# Altium PCB AdaptWing.PcbDoc
Units mil, origin at the board's own origin, x right, y up, seen from the top; angles counter-clockwise.
Board outline 2834.65 x 1811.02 mil, 2 copper layers (Top Layer, Bottom Layer); 33 components, 14 nets, 224 pads, 75 vias.
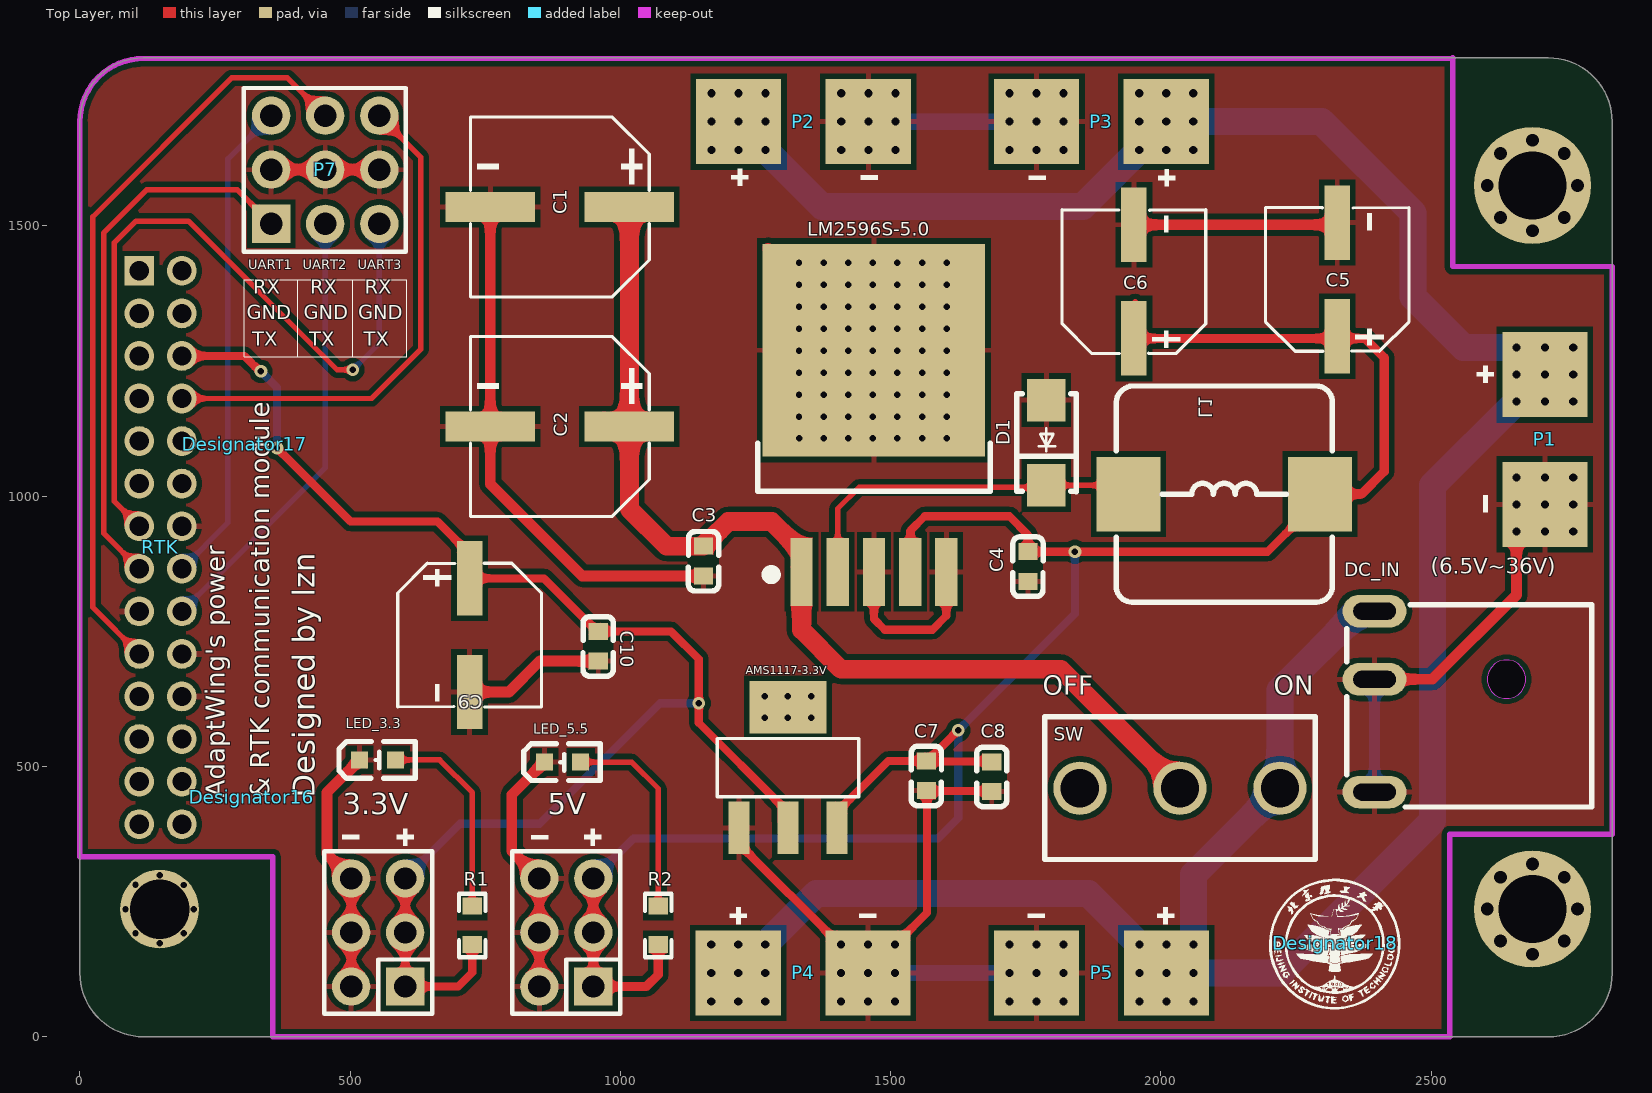
[diagram p0: Top Layer view]
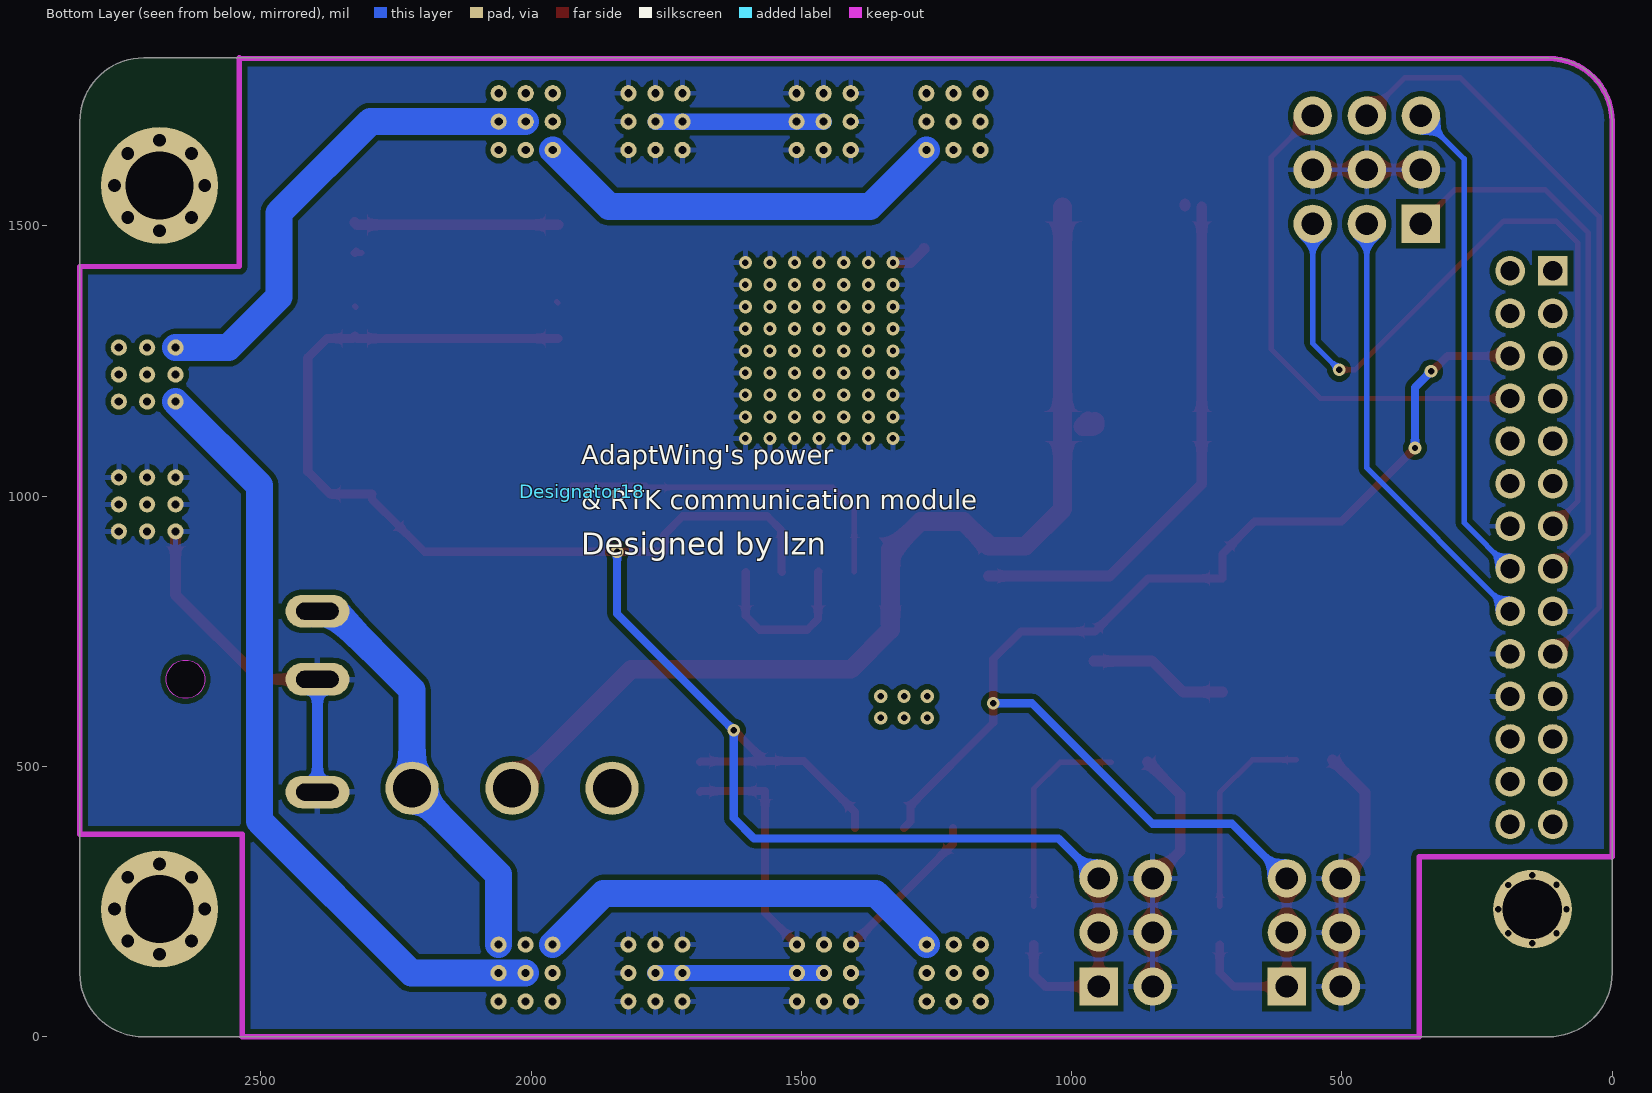
[diagram p1: Bottom Layer view, seen from below]
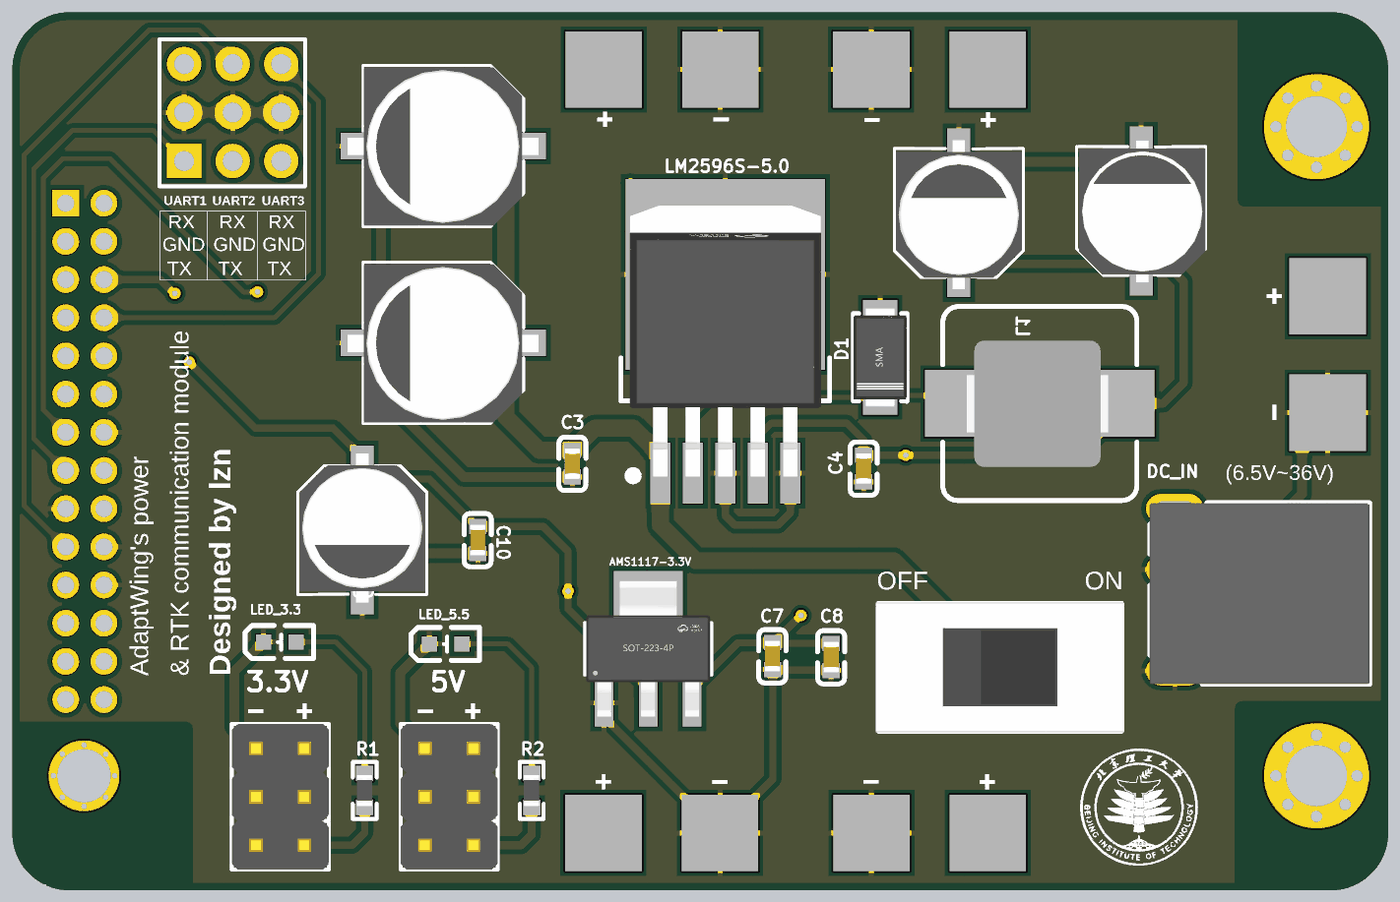
[diagram p2: 3D render of the assembled board from above, using the file's embedded part models]

## Layer stack, top to bottom
Top Solder: solder mask 0.4, Solder Resist, Dk 3.5
Top Layer: signal copper 1.4
Dielectric 1: dielectric 12.6, FR-4, Dk 4.8
Bottom Layer: signal copper 1.4
Bottom Solder: solder mask 0.4, Solder Resist, Dk 3.5

## Board outline
0,118.11 0,1692.91 cw(c118.11,1692.91) 118.11,1811.02 2716.54,1811.02 cw(c2716.54,1692.91) 2834.65,1692.91 2834.65,118.11 cw(c2716.54,118.11) 2716.54,0 118.11,0 cw(c118.11,118.11)

## Design rules (kind name [scope] priority, off if disabled: settings)
Clearance [All] p1: gap=10 ignorepadtopadclearanceinfootprint=FALSE except(0: Arc-Hole Track-Hole SMDPad-Hole THPad-Hole Via-Hole Fill-Hole Poly-Hole Region-Hole Text-Hole)
PolygonConnect [All] p1: connectstyle=Relief reliefconductorwidth=10 reliefentries=4 polygonreliefangle="90 Angle" airgapwidth=10
RoutingVias [All] p1: holewidth=28 width=50 viastyle="Through Hole" minholewidth=28 minwidth=50 maxholewidth=28 maxwidth=50
SolderMaskExpansion [All] p1: expansion=4 istentingtop=FALSE
Width Width_6 [InNet('UART3_RXD')] p1: maxlimit=10 minlimit=5 preferedwidth=7
Width Width_5 [InNet('3.3V')] p2: maxlimit=15 minlimit=10 preferedwidth=15
Width Width_4 [InNet('5V')] p3: maxlimit=17 minlimit=10 preferedwidth=17
Width Width_3 [InNet('GND')] p4: maxlimit=30 minlimit=10 preferedwidth=15
Width Width_2 [InNet('BAT')] p5: maxlimit=35 minlimit=10 preferedwidth=10
Width Width_1 [InNet('NetDC_IN_1')] p6: maxlimit=80 minlimit=10 preferedwidth=10
Width [All] p7: maxlimit=10 minlimit=10 preferedwidth=10
30 further rules are at their usual default settings.

## Classes and differential pairs
component class AdaptWing: 3.3V AMS1117-3.3V C1 C2 C3 C4 C5 C6 C7 C8 C9 C10 D1 DC_IN L1 LED_3.3 LED_5.5 LM2596S-5.0 P1 P2 P3 P4 P5 P7 R1 R2 RTK SW

## Components (designator, comment, footprint, x,y, rotation, side; value= is the part's Value field where it differs from the comment)
3.3V "3.3V" HDR-TH_6P-P2.54-V-M-R2-C3-S2.54-1 552,193 r90 top
5V "5V" HDR-TH_6P-P2.54-V-M-R2-C3-S2.54-1 900,193 r90 top
AMS1117-3.3V "AMS1117-3.3V" SOT-223-4_L6.5-W3.5-P2.30-LS7.0-BR 1325,498 r270 top
C1 "50V/220uF" CAP-SMD_BD8.0-L8.3-W8.3-FD 888,1535 r180 top
C2 "50V/100uF" CAP-SMD_BD8.0-L8.3-W8.3-FD 888,1129 r180 top
C3 "104" C0603 1154,880 r90 top
C4 "104" C0603 1754,870 r90 top
C5 "25V/220uF" CAP-SMD_BD6.3-L6.6-W6.6-LS7.4-FD 2326,1401 r90 top
C6 "16V/100uF" CAP-SMD_BD6.3-L6.6-W6.6-FD 1950,1397 r90 top
C7 "104" C0603 1566,483 r90 top
C8 "106" C0603 1687,481 r90 top
C9 "16V/100uF" CAP-SMD_BD6.3-L6.6-W6.6-FD 721,743 r270 top
C10 "104" C0603 959,722.55 r90 top
D1 "1N5824" 1N5824 1788,1099 r90 top
DC_IN "DC插座" DC-IN-TH_DC-044-BXXX 2540,625 r180 top
Designator16 "Comment" ID 318,444 r90 top
Designator17 "Comment" 串口引脚注释 305,1097 r0 top
Designator18 "Comment" BIT 2322,174 r0 top
Designator18 "Comment" ID 1904.96,1009 r180 bottom
L1 "33uH" 1040电感 2117,1009 r0 top
LED_3.3 "LED_3.3" 0603_LED 550,513 r0 top
LED_5.5 "LED_5.5" 0603_LED 892,509 r0 top
LM2596S-5.0 "LM2596S-5.0" TO263-5A 1469,1266.93 r0 top
P1 "XT60" 分电焊盘 2710,1105 r0 top
P2 "分电焊盘" 分电焊盘 1338.58,1692.91 r90 top locked
P3 "分电焊盘" 分电焊盘 1889.76,1692.91 r270 top locked
P4 "分电焊盘" 分电焊盘 1338,118.11 r90 top locked
P5 "分电焊盘" 分电焊盘 1890,118.11 r270 top locked
P7 "串口输出接口" 2.54mm-3×3p 354,1504 r0 top
R1 "1K" 0603C 727,206 r90 top
R2 "1K" 0603C 1071,206 r90 top
RTK "排母2.0mm" 2MM-28PINS 110,1417 r270 top locked
SW "SS-12D10L5" SW-TH_SS-12D10L5 2035,460 r180 top

## Footprints (in the part's own frame and the unit in brackets; to place one, negate y for a bottom-side part, rotate by r counter-clockwise, add the part's x,y. Pads: shape width x height; smd on the part's side, far side on the other; paste and mask are expansions set on the pad)
1N5824 [mm]
  rect 2x1.8 smd paste+0 mask+0.102: 1(-2,0) 2(2,0)
  silkscreen extent -2.3,-1.4 2.3,1.4, body extent -2.6,-1.4 2.6,1.4, height 2.1
2.54mm-3×3p [mm]
  rect 1.8x1.8 hole 1.05 paste+0 mask+0.051: 1(0,0)
  round 1.8 hole 1.05 paste+0 mask+0.051: 2(2.54,0) 3(5.08,0) 4(0,2.54) 5(2.54,2.54) 6(5.08,2.54) 7(0,5.08) 8(2.54,5.08) 9(5.08,5.08)
  silkscreen extent -1.3,-1.32 6.32,6.38
2MM-28PINS [mm]
  rect 1.4x1.4 hole 0.9 paste+0 mask+0.051: 1(0,0)
  round 1.4 hole 0.9 paste+0 mask+0.051: 2(0,2) 3(2,0) 4(2,2) 5(4,0) 6(4,2) 7(6,0) 8(6,2) 9(8,0) 10(8,2) 11(10,0) 12(10,2) 13(12,0) 14(12,2) 15(14,0) 16(14,2) 17(16,0) 18(16,2) 19(18,0) 20(18,2) 21(20,0) 22(20,2) 23(22,0) 24(22,2) 25(24,0) 26(24,2) 27(26,0) 28(26,2)
0603_LED [mm]
  rect 0.8x0.8 smd mask+0.051: 1(0.874,-0.019) 2(-0.828,-0.019)
  silkscreen extent -1.79,-0.88 1.79,0.84, body extent -0.71,-0.42 0.91,0.39, height 0.41
0603C [mm] "1.6mmx0.8mm"
  rect 0.8x0.9 smd: 1(-0.895,0.024) 2(0.905,0.024)
  silkscreen extent -1.5,-0.6 1.5,0.65, body extent -0.81,-0.38 0.81,0.43, height 0.45
1040电感 [mm]
  rect 3x3.5 smd paste+0 mask+0.102: 1(-4.5,-0.127) 2(4.5,-0.127)
  silkscreen extent -5.08,-5.21 5.08,4.95, body extent -3.83,-3.44 3.57,3.16, height 3
BIT [mil]
  silkscreen extent -122,-123 121,118
C0603 [mm]
  rect 0.8x0.9 smd paste+0 mask+0.051: 1(-0.7,0) 2(0.7,0)
  silkscreen extent -1.41,-0.71 1.39,0.72, body extent -0.8,-0.4 0.8,0.4, height 0.8
CAP-SMD_BD6.3-L6.6-W6.6-FD [mm]
  rect 3.5x1.2 smd paste+0 mask+0.051: 1(-2.67,0) 2(2.67,0)
  silkscreen extent -3.38,-3.38 3.38,3.38, body extent -4,-3.3 3.8,3.3, height 7.75
CAP-SMD_BD6.3-L6.6-W6.6-LS7.4-FD [mm]
  rect 3.5x1.2 smd paste+0 mask+0.051: 1(-2.67,0) 2(2.67,0)
  silkscreen extent -3.38,-3.38 3.38,3.38, body extent -3.73,-3.35 3.67,3.25, height 7.72
CAP-SMD_BD8.0-L8.3-W8.3-FD [mm]
  rect 4.2x1.4 smd paste+0 mask+0.051: 1(-3.267,0) 2(3.267,0)
  silkscreen extent -4.2,-4.23 4.2,4.23, body extent -4.97,-4.13 5.03,4.18, height 10.05
DC-IN-TH_DC-044-BXXX [mil]
  oval 118.11x60 hole 31.5 slot 78.74 at 0 deg paste+0 mask+1.97: 1(145,-162.33) 2(145,172.33) 3(145,-36.33)
  Keep-Out Layer board cut-out: -63.66,-36.34 -63.66,-31.67 -66.07,-22.66 -70.74,-14.58 -77.33,-7.98 -85.41,-3.32 -94.43,-0.9 -103.75,-0.9 -112.77,-3.32 -120.85,-7.98 -127.44,-14.58 -132.11,-22.66 -134.52,-31.67 -134.52,-36.34 -134.52,-41 -132.11,-50.01 -127.44,-58.09 -120.85,-64.69 -112.77,-69.35 -103.75,-71.77 -94.43,-71.77 -85.41,-69.35 -77.33,-64.69 -70.74,-58.09 -66.07,-50.01 -63.66,-41 -63.66,-36.34 -63.66,-36.34
  silkscreen extent -257,-174 196,200, body extent -256,-174 197,200, height 280
HDR-TH_6P-P2.54-V-M-R2-C3-S2.54-1 [mm]
  rect 1.8x1.8 hole 1.05 paste+0 mask+0.051: 1(-2.54,-1.27)
  round 1.8 hole 1.05 paste+0 mask+0.051: 2(-2.54,1.27) 3(0,-1.27) 4(0,1.27) 5(2.54,-1.27) 6(2.54,1.27)
  silkscreen extent -3.81,-2.54 3.81,2.54, body extent -3.81,-2.54 3.81,2.54, height 8.5
ID [mil]
SOT-223-4_L6.5-W3.5-P2.30-LS7.0-BR [mm]
  rect 2.47x0.98 smd paste+0 mask+0.051: 1(2.835,-2.681) 2(2.835,-0.381) 3(2.835,1.919)
  rect 2.47x3.6 smd paste+0 mask+0.051: 4(-2.835,-0.381)
  silkscreen extent -1.37,-3.71 1.37,2.95, body extent -3.55,-3.63 3.55,2.87, height 1.75
SW-TH_SS-12D10L5 [mm]
  round 2.5 hole 1.8 paste+0 mask+0.051: 1(-4.7,0) 2(0,0) 3(4.7,0)
  silkscreen extent -6.35,-3.35 6.35,3.35, body extent -6.5,-3.4 6.5,3.4, height 10.1
TO263-5A [mm]
  rect 1.05x3.2 smd paste+0 mask+0.051: 1(-3.4,-10.336) 2(-1.7,-10.336) 3(0,-10.336) 4(1.7,-10.336) 5(3.4,-10.336)
  rect 10.45x10 smd paste+0 mask+0.051: 3(0,0.078)
  silkscreen extent -5.46,-10.66 5.46,-4.3, body extent -5,-10.5 5,3.7, height 4.5
串口引脚注释 [mil]
  silkscreen extent -1,161 299,304
分电焊盘 [mil]
  round 30 hole 15: 1(-52.5,70) 1(-52.5,120) 1(-52.5,170) 1(0,70) 1(0,120) 1(0,170) 1(52.5,70) 1(52.5,120) 1(52.5,170) 2(-52.5,-170) 2(-52.5,-120) 2(-52.5,-70) 2(0,-170) 2(0,-120) 2(0,-70) 2(52.5,-170) 2(52.5,-120) 2(52.5,-70)
  rect 157.48x157.48 smd: 1(0,120) 2(0,-120)

## Part data
AMS1117-3.3V: "3.3V稳压芯片"
C1 C2 C5: BOM_Manufacturer=Yunxing, BOM_Manufacturer Part=ECG1KM470F14OTBO, BOM_Supplier=LCSC, BOM_Supplier Part=C525429, Contributor=LCSC, nameAlias=Capacitance, spicePre=C, spiceSymbolName="ECG1KM470F14OTBO COPY"
C6 C9: "电解电容", BOM_Manufacturer=Yunxing, BOM_Manufacturer Part=ECG1KM470F14OTBO, BOM_Supplier=LCSC, BOM_Supplier Part=C525429, Contributor=LCSC, nameAlias=Capacitance, spicePre=C, spiceSymbolName="ECG1KM470F14OTBO COPY"
L1: BOM_JLCPCB Part Class="Extended Part", BOM_Manufacturer=MAZO, BOM_Manufacturer Part=MPCA-0630-1R0-M, BOM_Supplier=LCSC, BOM_Supplier Part=C268399, Contributor=liuliubilc, nameAlias=Inductance, spicePre=L, spiceSymbolName=0630-1R0电感
LED_3.3: "LED_3.3，使用绿色LED"
LED_5.5: "LED_5.5，使用蓝色LED"
LM2596S-5.0: "5V稳压"
P1: "航模电池接口"
P2 P3 P4 P5: library part PWR_DIV
P7: library part 2.54mm-3×3p
R1 R2: "Resistor", LatestRevisionDate=17-Jul-2002, LatestRevisionNote="Re-released for DXP Platform.", PackageDescription="Axial Device, Thru-Hole; 2 Leads; 0.4 in Pin Spacing", PackageReference=AXIAL-0.4, Published=8-Jun-2000, Publisher="Altium Limited"
SW: "两档滑动开关", Actuator Color=黑色, Current Rating (AC)=3A, JLCPCB Part Class=扩展库, LCSC Part Name="柄长5mm 直插双档 滑动开关 大电流", Manufacturer="XKB Connectivity(中国星坤)", Operating Temperature=-40℃~+85℃, Voltage Rating (AC)=125V, Actuator Style=矩形柱状, Add into BOM=yes, Circuit=单刀双掷, Convert to PCB=yes, Current Rating (DC)=3A, Datasheet=https://atta.szlcsc.com/upload/public/pdf/source/20211009/D6412F37AABE6F9459A6EE7FA4DAEADB.pdf, Device=SS-12D10L5, Manufacturer Part=SS-12D10L5, Mechanical Life=1万次, Mounting Style=直插, Name=SS-12D10L5, Pin Style=PC引脚, Supplier=LCSC, Supplier Footprint=插件, Supplier Part=C319012, Switch Height=6.4mm, Switch Length=13mm, Switch Width=6.8mm, Symbol=SS-12D10L5, Voltage Rating (DC)=125V
C3 C4 C7 C8 C10: Contributor=LCEDA_Lib, nameAlias=Value(F), spicePre=C, spiceSymbolName=C_0603_US
D1: BOM_Supplier=lynxfoor, Contributor=xuncikulv, spicePre=D, spiceSymbolName=1N5824贴片

## Free pads (board coordinates)
  round 12.99 hole 11.81 paste+0 mask+4: 1(84.65,236.22) 1(103,281) 1(103.1,191.68) 1(147.64,173.23) 1(147.64,299.21) 1(192.18,280.76) 1(192.18,191.68) 1(210.63,236.22)
  round 145.67 hole 110.24 paste+0 mask+4: 1(147.64,236.22)
  round 24.21 hole 23.62 paste+0 mask+4: 1(2603.35,236.22) 1(2603.35,1574.8) 1(2627.95,177.17) 1(2627.95,295.28) 1(2627.95,1515.75) 1(2627.95,1633.86) 1(2687.01,152.56) 1(2687.01,319.88) 1(2687.01,1491.14) 1(2687.01,1658.46) 1(2746.06,177.17) 1(2746.06,295.28) 1(2746.06,1515.75) 1(2746.06,1633.86) 1(2770.67,236.22) 1(2770.67,1574.8)
  round 216.53 hole 125.98 paste+0 mask+4: 1(2687.01,236.22) 1(2687.01,1574.8)

## Via types
v1: diameter 24.21, hole 12, Top Layer to Bottom Layer, 69 vias
v2: diameter 23.62, hole 11.81, Top Layer to Bottom Layer, 6 vias

## Nets (pads, with @x,y where several pads share a name; then routed paths per layer and width w, separated by ;. In a path a pad name is that pad's centre, name@x,y a point inside that pad or via, vN(x,y) a via of type N, cw(c..) or ccw(c..) an arc to the next point about the centre after c; other vN are vias at no path point)
3.3V: 3.3V.1 3.3V.3 3.3V.5 AMS1117-3.3V.2 C9.1 C10.2 R1.1 RTK.6 | length 2738.3
  Top Layer w15: RTK.6 304.39,1259.52 332.91,1231 v2(335,1231) ; v2(364.78,1089.22) 501,953 661.4,953 721,893.4 C9.1 859.02,848.12 957.03,750.11 1093.89,750.11 1145,699 1145,581 1298.21,427.79 1298.21,398.18 AMS1117-3.3V.2 ; 3.3V.1 700,93 726.04,119.04 R1.1 ; 3.3V.1@602,94 3.3V.3 3.3V.5 3.3V.5@602,307
  Bottom Layer w15: v2(335,1231) 364.78,1201.22 v2(364.78,1089.22) ; 3.3V.5 703.09,394.09 850.14,394.09 1073.05,617 v2(1145,617)
5V: 5V.1 5V.3 5V.5 AMS1117-3.3V.3 C4.2 C5.1 C6.1 C7.2 C8.2 L1.2 LM2596S-5.0.4 R2.1 | length 3902.9
  Top Layer w10: C6.1@1950,1357.63 C6.1@1952.08,1359.71 ; C5.1@2323.92,1349.71 C5.1@2326,1351.79
  Top Layer w15: AMS1117-3.3V.3 1400.55,415.72 1495.39,510.56 C7.2 ; LM2596S-5.0.4 1536.71,860.78 1536.71,936.71 1563,963 1719.64,963 1754,928.64 C4.2 1754.28,897.28 v2(1840.72,897.28) 2197.29,897.28 2242.61,942.6 2294.17,994.16 L1.2 ; v2(1625,567) 1624.41,567 1567.97,510.56 C7.2 ; C8.2 1686,509.56 1567,509.56 C7.2
  Top Layer w17: 5V.5 5V.3 5V.1 1048,93 1070.04,115.04 R2.1 ; C6.1 2321.99,1291.88 C5.1 2329.89,1292 2377,1292 2413,1256 2413,1046 2371,1004 L1.2
  Bottom Layer w15: 5V.5 1024,367 1587.45,367 1625,404.55 v2(1625,567) 1840.72,782.72 v2(1840.72,897.28) v2@1843.06,897.28
BAT: C1.1 C2.1 C3.2 LM2596S-5.0.1 SW.2 | length 1955.8
  Top Layer w35: C2.1@956.9,1131 C2.1@956.9,1138.57 ; C2.1@961.51,1129 979.43,1129 C2.1@969.37,1139.06 ; C1.1 C2.1 1016.63,976.37 1085.44,907.55 C3.2 1199.44,953 1280,953 1327.51,905.49 1331.97,905.49 1335.14,902.32 1335.14,752.86 1408,680 1815,680 SW.2
GND: 3.3V.2 3.3V.4 3.3V.6 5V.2 5V.4 5V.6 AMS1117-3.3V.1 C1.2 C2.2 C3.1 C4.1 C5.2 C6.2 C7.1 C8.1 C9.2 C10.1 D1.2 DC_IN.2 DC_IN.3 LED_3.3.2 LED_5.5.2 LM2596S-5.0.3 LM2596S-5.0.5 P1.2 P2.2 P3.2 P4.2 P5.2 P7.4 P7.5 P7.6 RTK.14 RTK.17 RTK.20 RTK.22 | length 5358.4
  Top Layer w10: C5.2@2312.73,1450.21 C5.2@2326,1450.21
  Top Layer w15: 3.3V.2@502,94 3.3V.4 3.3V.6 ; 5V.2 5V.4 5V.6 ; AMS1117-3.3V.1 1219.45,357.06 1405.89,170.61 P4.2@1408,170.61 ; P4.2@1458,118.11 P4.2@1508,118.11 ; P2.2@1458.58,1692.91 P2.2@1508.58,1692.91 ; LM2596S-5.0.3@1468,861 1469,860 1469,773 1489,753 1577,753 1602.86,778.86 LM2596S-5.0.5 ; P4.2@1508,170.61 1567,229.61 1567,454.44 1686,454.44 C8.1 ; LM2596S-5.0.3@1508.58,1435.93 v1(1512.51,1432) ; P3.2@1719.76,1692.91 P3.2@1769.76,1692.91 ; P5.2@1720,118.11 P5.2@1770,118.11 ; C5.2@2323.21,1453 C5.2@2326,1450.21
  Top Layer w20: P7.4 P7.5 P7.6 ; 3.3V.6 457,338 457,451.85 LED_3.3.2 ; C9.2 793.88,637.88 851,695 C10.1 ; C1.2 C2.2 759.37,1022.63 929.56,852.45 C3.1 ; C1.2@790,1537 C1.2@790,1540.53 ; 5V.6 799,344 799,447.85 LED_5.5.2 ; LM2596S-5.0.3@1273.29,1458.71 1273.29,1456.85 1298.14,1432 v1(1330.39,1432) ; C6.2 2322.01,1502.12 C5.2 ; DC_IN.3 2501.33,661.33 2657.5,817.5 P1.2@2657.5,935
  Bottom Layer w20: DC_IN.2 DC_IN.3
  Bottom Layer w30: P4.2@1458,118.11 1508,118.11 1720,118.11 P5.2@1770,118.11 ; P2.2@1458.58,1692.91 1508.58,1692.91 1719.76,1692.91 P3.2@1769.76,1692.91
  other v1: 1330.41,1107 1375.94,1107 1421.47,1107 1467,1107 1512.53,1107 1558.06,1107 1603.59,1107 1330.39,1146.75 1375.92,1146.75 1421.45,1146.75 1466.98,1146.75 1512.51,1146.75 1558.04,1146.75 1603.57,1146.75 1330.39,1187.5 1375.92,1187.5 1421.45,1187.5 1466.98,1187.5 1512.51,1187.5 1558.04,1187.5 1603.57,1187.5 1330.39,1228.25 1375.92,1228.25 1421.45,1228.25 1466.98,1228.25 1512.51,1228.25 1558.04,1228.25 1603.57,1228.25 1330.39,1269 1375.92,1269 1421.45,1269 1466.98,1269 1512.51,1269 1558.04,1269 1603.57,1269 1330.39,1309.75 1375.92,1309.75 1421.45,1309.75 1466.98,1309.75 1512.51,1309.75 1558.04,1309.75 1603.57,1309.75 1330.39,1350.5 1375.92,1350.5 1421.45,1350.5 1466.98,1350.5 1512.51,1350.5 1558.04,1350.5 1603.57,1350.5 1330.39,1391.25 1375.92,1391.25 1421.45,1391.25 1466.98,1391.25 1512.51,1391.25 1558.04,1391.25 1603.57,1391.25 1375.92,1432 1421.45,1432 1466.98,1432 1558.04,1432 1603.57,1432
NetD1_1: D1.1 L1.1 LM2596S-5.0.2 | length 679.5
  Top Layer w10: LM2596S-5.0.2 1402.07,977.07 1441.32,1016.32 1784.06,1016.32 D1.1 1923.57,1020.26 L1.1
NetDC_IN_1: DC_IN.1 P1.1 P2.1 P3.1 P4.1 P5.1 SW.1 | length 4680.9
  Bottom Layer w50: P4.1@1268,170.61 1362.39,265 1865.61,265 P5.1@1960,170.61 ; P2.1@1268.58,1640.41 1373,1536 1855.35,1536 P3.1@1959.76,1640.41 ; P3.1@2009.76,1692.91 2059.76,1692.91 2297.31,1692.91 2466,1524.23 2466,1369 2560,1275 P1.1@2657.5,1275 ; P5.1@2010,118.11 2060,118.11 2221.11,118.11 2502,399 2502,1019.5 P1.1@2657.5,1175 ; P5.1@2060,170.61 2060,299.96 SW.1 2220.04,641.42 2365.95,787.33 DC_IN.1
NetLED_3.3_1: LED_3.3.1 R1.2 | length 377
  Top Layer w10: LED_3.3.1 665.75,512.25 726.04,451.96 R1.2
NetLED_5.5_1: LED_5.5.1 R2.2 | length 381.4
  Top Layer w10: LED_5.5.1 1020.75,508.25 1070.04,458.96 R2.2
UART1_RXD: P7.7 RTK.16 | length 906.6
  Bottom Layer w10: RTK.16 274,951.08 274,1624 P7.7
UART1_TXD: P7.1 RTK.15 | length 1017.8
  Top Layer w10: RTK.15 44,931.82 44,1487 124,1567 291,1567 P7.1
UART2_RXD: P7.8 RTK.19 | length 1409.7
  Top Layer w10: RTK.19 24,794.34 24,1517 281,1774 384,1774 P7.8
UART2_TXD: P7.2 RTK.18 | length 826.8
  Bottom Layer w10: RTK.18 454,1052.34 P7.2
UART3_RXD: P7.9 RTK.8 | length 943.9
  Top Layer w10: RTK.8 539.78,1180.78 631,1272 631,1627 P7.9
UART3_TXD: P7.3 RTK.13 | length 1405.3
  Top Layer w10: RTK.13 64,990.56 64,1469 104,1509 201,1509 476,1234 v2(505,1234)
  Bottom Layer w10: v2(505,1234) 554,1283 P7.3
pads on no net: AMS1117-3.3V.4 RTK.1 RTK.2 RTK.3 RTK.4 RTK.5 RTK.7 RTK.9 RTK.10 RTK.11 RTK.12 RTK.21 RTK.23 RTK.24 RTK.25 RTK.26 RTK.27 RTK.28 SW.3
copper on no net:
  other v1: 1267,590 1310,590 1353,590 1267,630 1310,630 1353,630

## Polygon pours and split planes (outlines as drawn)
GND on Bottom Layer "GND_L02_P000" (solid, pour order 0): 11,1742 14,1745 14,1754 24,1764 24,1768 36,1780 40,1780 50,1790 58,1790 69,1801 89,1801 96,1808 107,1808 109,1810 2539,1810 2540,1809 2540,1424 2833,1424 2834,1425 2836,1423 2836,374 2534,374 2533,373 2533,2 360,2 358,0 355,3 355,332 4,332 0.3,335.7 0.3,1725.3 6,1731 6,1739 11,1744
GND on Top Layer "GND_L01_P001" (solid, pour order 1): 5,1724 5,1728 9,1732 9,1742 15,1748 15,1753 22,1760 22,1764 30,1772 30,1773 40,1783 44,1783 50,1789 53,1789 62,1798 70,1798 76,1804 83,1804 87,1808 94,1808 95,1809 108,1809 110,1811 2540,1811 2541,1810 2541,1426 2831,1426 2835,1422 2835,376 2536,376 2533,373 2534,372 2534,0 359,0 356,3 356,331 4,331 0,335 4,339 4,1725

## Keep-outs
Keep-Out Layer:
  lines w10: 2538.07,1809.72 118.11,1809.72 ccw(c117.46,1692.26) 0,1692.91 0,333 357,333 357,236.22 357,0 2534,0 2534,375 2834.65,375 2834.65,1425 2539.37,1425 2539.37,1811.02

## Silkscreen, mask and mechanical layers (free items; w line width, h text height)
Top Overlay:
  region: 839.22,373 866.78,373 866.78,365.13 835.28,365.13 835.28,373
  region: 937.2,373.43 964.76,373.43 964.76,365.56 933.26,365.56 933.26,373.43
  region: 945.07,357.69 945.07,385.24 952.95,385.24 952.95,353.75 945.07,353.75
  region: 1209.19,1593.87 1236.75,1593.87 1236.75,1586 1205.25,1586 1205.25,1593.87
  region: 1217.5,1577.95 1217.5,1605.51 1225.38,1605.51 1225.38,1574.01 1217.5,1574.01
  region: 2596.13,974.19 2596.13,1001.75 2604,1001.75 2604,970.25 2596.13,970.25
  region: 2596.3,1213.63 2596.3,1241.19 2604.18,1241.19 2604.18,1209.69 2596.3,1209.69
  region: 2612.05,1221.5 2584.49,1221.5 2584.49,1229.38 2615.99,1229.38 2615.99,1221.5
  region: 1759.19,1592.87 1786.75,1592.87 1786.75,1585 1755.25,1585 1755.25,1592.87
  region: 1998.63,1592.7 2026.19,1592.7 2026.19,1584.82 1994.69,1584.82 1994.69,1592.7
  region: 2006.5,1576.95 2006.5,1604.51 2014.38,1604.51 2014.38,1573.01 2006.5,1573.01
  region: 2004.5,211.95 2004.5,239.51 2012.38,239.51 2012.38,208.01 2004.5,208.01
  region: 1996.63,227.7 2024.19,227.7 2024.19,219.82 1992.69,219.82 1992.69,227.7
  region: 1757.19,227.87 1784.75,227.87 1784.75,220 1753.25,220 1753.25,227.87
  region: 1448.63,1593.7 1476.19,1593.7 1476.19,1585.82 1444.69,1585.82 1444.69,1593.7
  region: 1214.5,211.95 1214.5,239.51 1222.38,239.51 1222.38,208.01 1214.5,208.01
  region: 1206.19,227.87 1233.75,227.87 1233.75,220 1202.25,220 1202.25,227.87
  region: 1445.63,227.7 1473.19,227.7 1473.19,219.82 1441.69,219.82 1441.69,227.7
  region: 489.2,373.43 516.76,373.43 516.76,365.56 485.26,365.56 485.26,373.43
  region: 590.2,373.43 617.76,373.43 617.76,365.56 586.26,365.56 586.26,373.43
  region: 598.07,357.69 598.07,385.24 605.95,385.24 605.95,353.75 598.07,353.75
  text "(6.5V~36V)" at 2499,846.4 h50
  text "OFF" at 1781,620.62 h60
  text "ON" at 2209,620.62 h60
Mechanical 1:
  the board outline again, w10

## Text inside footprints (layer, text, board x,y; h text height)
Designator16: Top Overlay "& RTK communication module" at 362.87,442 h60 r90; Top Overlay "AdaptWing's power" at 279.73,442 h60 r90; Top Overlay "Designed by lzn" at 448.83,442 h70 r90
Designator17: Top Overlay "GND" at 515,1318.47 h45; Top Overlay "TX" at 525,1269 h45; Top Overlay "TX" at 424,1269 h45; Top Overlay "TX" at 319,1269 h45; Top Overlay "GND" at 414,1318.47 h45; Top Overlay "GND" at 309,1318.47 h45; Top Overlay "RX" at 426,1365 h45; Top Overlay "RX" at 321,1365 h45; Top Overlay "RX" at 527,1365 h45; Top Overlay "UART3" at 514,1413.35 h30; Top Overlay "UART2" at 412.12,1413.36 h30; Top Overlay "UART1" at 312,1413.36 h30
Designator18: Bottom Overlay "& RTK communication module" at 1906.96,964.13 h60; Bottom Overlay "AdaptWing's power" at 1906.96,1047.27 h60; Bottom Overlay "Designed by lzn" at 1906.96,878.17 h70